# Altium PCB HANDS_FREE_ControlUnit_V1.PcbDoc (part 2 of 3)
Units mil, origin at the board's own origin, x right, y up, seen from the top; angles counter-clockwise.
Board outline 2372.03 x 3554.03 mil, 2 copper layers (Top Layer, Bottom Layer); 33 components, 66 nets, 337 pads, 84 vias.
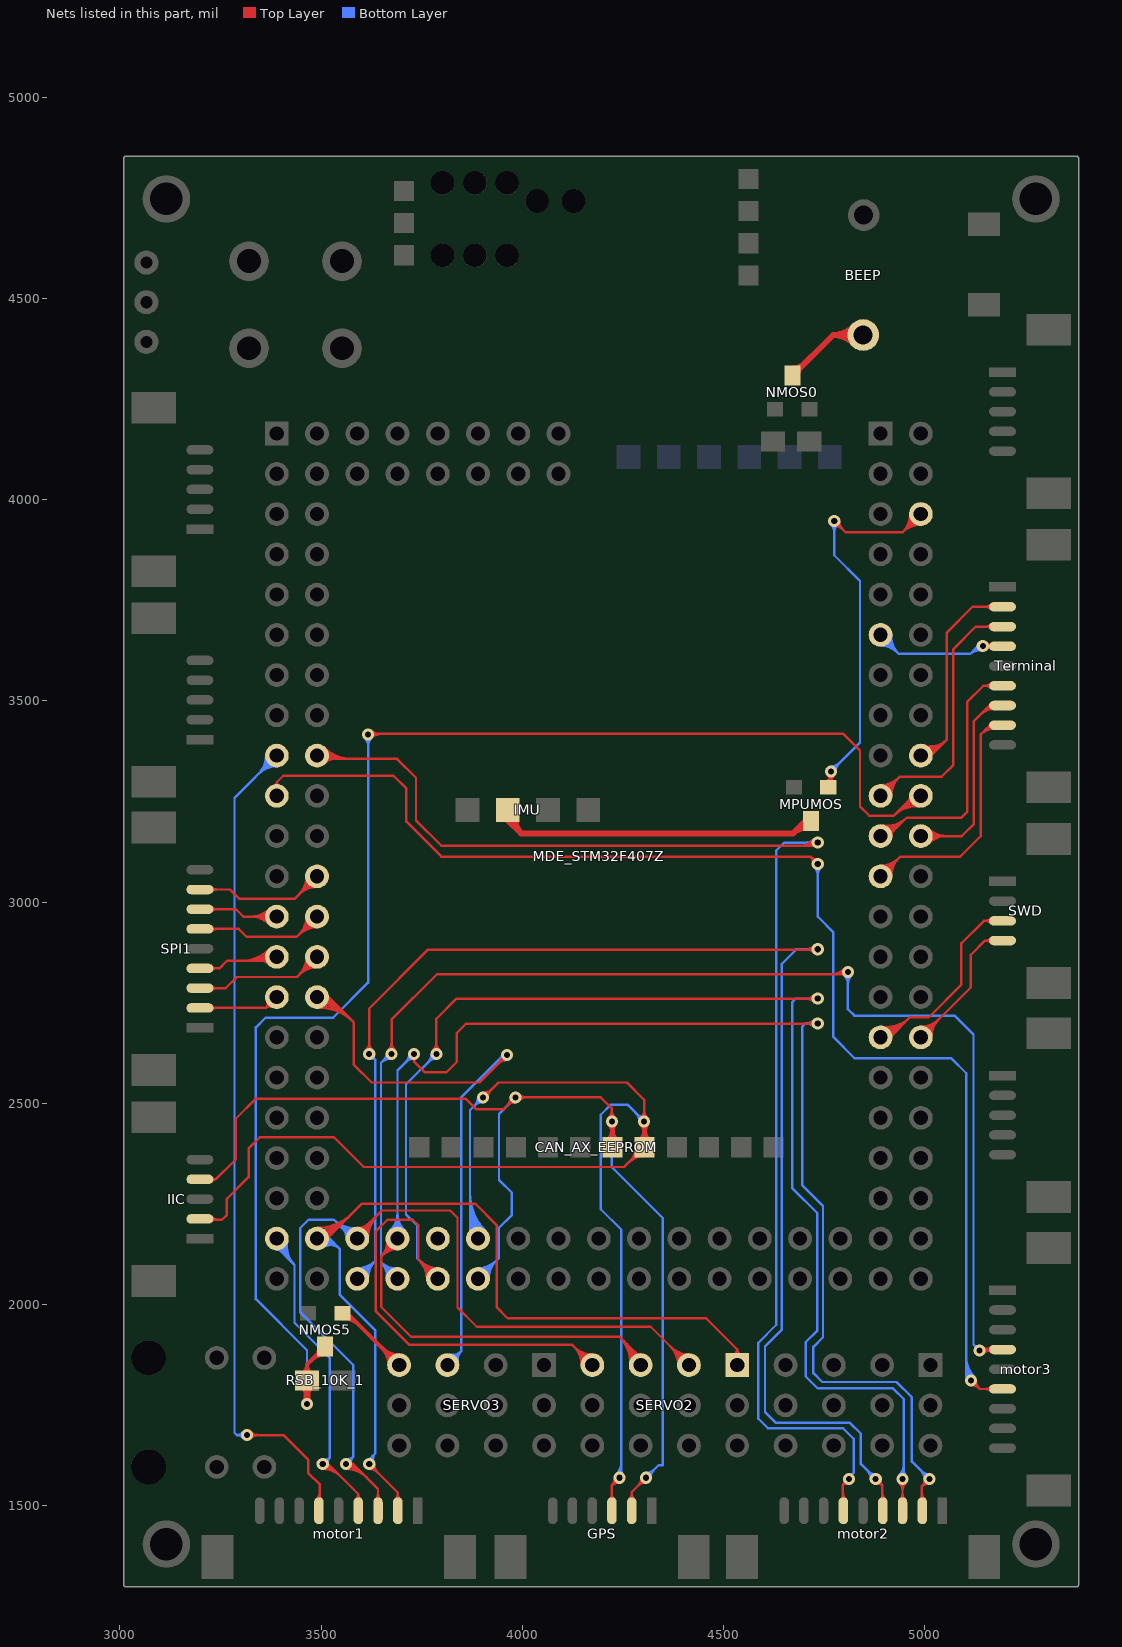
[diagram p2: the nets of this part, all layers, seen from the top]

## Via types
v1: diameter 30, hole 15, Top Layer to Bottom Layer, 70 vias
v2: diameter 40, hole 20, Top Layer to Bottom Layer, 11 vias
v3: diameter 50, hole 25, Top Layer to Bottom Layer, 3 vias

## Nets (pads, with @x,y where several pads share a name; then routed paths per layer and width w, separated by ;. In a path a pad name is that pad's centre, name@x,y a point inside that pad or via, vN(x,y) a via of type N, cw(c..) or ccw(c..) an arc to the next point about the centre after c; other vN are vias at no path point) (continued)
I2C2_SCL: CAN_AX_EEPROM.6 GPS.2 IIC.4 MDE_STM32F407Z.69 | length 3807.8
  Top Layer w6: IIC.4@3202,2311 3238,2311 ; IIC.4@3227.56,2305.95 cw(c3238,2297.68) 3238,2311 ; IIC.4@3227.96,2316.34 ccw(c3238,2323.1) 3238,2311 ; v1@3971,2515 cw(c3942.03,2515) 3962.51,2494.51 cw(c3983,2474.03) v1@3983,2503 ; v1@3991.49,2506.51 cw(c4011.97,2486.03) 4011.97,2515 cw(c4011.97,2543.97) v1@3991.49,2523.49 ; CAN_AX_EEPROM.6@4208.44,2406.56 ccw(c4174.34,2440.66) v1@4222.57,2440.66 ; CAN_AX_EEPROM.6@4212.69,2402.31 ccw(c4188.82,2426.18) 4222.57,2426.18 ; CAN_AX_EEPROM.6@4214,2399 4222,2391 4222.57,2391.57 v1(4222.57,2455) 4222.57,2487.43 4195,2515 v1(3983,2515) 3954,2486 3885,2486 3859,2512 3338,2512 3288,2462 3288,2361 3238,2311 ; v1@4214.09,2446.51 cw(c4193.6,2426.03) 4222.57,2426.03 cw(c4251.54,2426.03) v1@4231.06,2446.51 ; v1@4214.09,2463.49 ccw(c4193.6,2483.97) 4222.57,2483.97 ccw(c4251.54,2483.97) v1@4231.06,2463.49 ; v1@4214.56,2446.07 cw(c4202.4,2432.51) 4220.27,2428.99 ; v1@4216.17,2444.85 cw(c4203.69,2425.09) 4226.49,2430.24 ; v1@4218.57,2450.53 cw(c4210.59,2441.64) 4222.31,2439.33 ; 4220.98,2432.61 cw(c4240.12,2428.84) v1@4229.25,2445.03 ; 4222.57,2418.59 ccw(c4251.59,2418.59) CAN_AX_EEPROM.6@4231.07,2398.07 ; 4222.57,2433.08 ccw(c4266.08,2433.08) CAN_AX_EEPROM.6@4235.31,2402.31 ; v1@4222.57,2447.56 ccw(c4280.56,2447.56) CAN_AX_EEPROM.6@4239.56,2406.56 ; 4224.6,2438.58 cw(c4239.77,2442.01) v1@4227.36,2451.38 ; 4227.45,2425.97 cw(c4253.28,2431.81) v1@4232.15,2447.77 ; GPS.2@4265.56,1515.88 ccw(c4250.52,1530.93) 4271.79,1530.93 ccw(c4293.06,1530.93) GPS.2@4278.02,1515.88 ; GPS.2@4271.79,1482 4271.79,1534.45 v1(4307.33,1570) ; v1@4295.33,1570 cw(c4266.36,1570) 4286.85,1549.51 cw(c4307.33,1529.03) v1@4307.33,1558
  Bottom Layer w6: MDE_STM32F407Z.69@3890,2064.14 3942,2116.14 3942,2191 3974,2223 3974,2278 3942,2310 3942,2474 v1(3983,2515) ; MDE_STM32F407Z.69@3890,2078.67 ccw(c3890,2113.74) 3914.8,2088.94 ccw(c3939.6,2064.14) MDE_STM32F407Z.69@3904.53,2064.14 ; MDE_STM32F407Z.69@3890,2084.67 ccw(c3890,2134.22) 3925.04,2099.18 ccw(c3960.09,2064.14) MDE_STM32F407Z.69@3910.53,2064.14 ; MDE_STM32F407Z.69@3890,2090.67 ccw(c3890,2154.71) 3935.29,2109.42 ccw(c3980.57,2064.14) MDE_STM32F407Z.69@3916.53,2064.14 ; v1@3971,2515 cw(c3942.03,2515) 3962.51,2494.51 cw(c3983,2474.03) v1@3983,2503 ; v1@4214.09,2446.51 cw(c4193.6,2426.03) 4222.57,2426.03 cw(c4251.54,2426.03) v1@4231.06,2446.51 ; v1(4222.57,2455) 4222.57,2341.43 4349,2215 4349,1601 4338.33,1601 v1(4307.33,1570) ; v1@4307.33,1582 ccw(c4307.33,1610.97) 4327.82,1590.49 ccw(c4348.3,1570) v1@4319.33,1570
I2C2_SDA: CAN_AX_EEPROM.5 GPS.3 IIC.2 MDE_STM32F407Z.70 | length 4781.3
  Top Layer w6: IIC.2@3170.79,2211 IIC.2@3201.21,2211 ; IIC.2@3199,2213.21 IIC.2@3201.21,2211 ; IIC.2@3214,2211 IIC.2@3201.21,2211 ; IIC.2@3222.64,2215.2 ccw(c3232.78,2225.34) 3232.78,2211 ; IIC.2@3226.88,2206.98 cw(c3236.58,2197.28) 3236.58,2211 ; IIC.2@3226.88,2219.44 ccw(c3247.27,2239.83) 3247.27,2211 ; v1(3902,2515) 3904,2515 3941,2552 4260,2552 4302.71,2509.29 v1(4302.71,2455) 4302.71,2391.71 4253,2342 3606,2342 3532,2416 3348,2416 3320,2388 3320,2317 3266,2263 3266,2223 3254,2211 IIC.2@3201.21,2211 ; v1@3902,2521 ccw(c3902,2540.31) 3915.66,2526.66 ; v1@3902,2527 ccw(c3902,2560.8) 3925.9,2536.9 ; v1@3914,2515 cw(c3938.14,2515) 3921.07,2532.07 ; GPS.3@4216.34,1515.88 ccw(c4201.3,1530.93) 4222.57,1530.93 ccw(c4243.85,1530.93) GPS.3@4228.81,1515.88 ; GPS.3@4222.57,1482 4222.57,1550.91 v1(4241.67,1570) ; v1@4229.68,1569.39 cw(c4205.34,1568.14) 4222.58,1550.91 cw(c4239.81,1533.68) v1@4241.05,1558.02 ; 4263.03,2352.03 cw(c4304,2311.06) CAN_AX_EEPROM.5@4304,2369 ; 4267.86,2356.86 ccw(c4233.72,2391) CAN_AX_EEPROM.5@4282,2391 ; 4273.27,2362.27 cw(c4304,2331.54) CAN_AX_EEPROM.5@4304,2375 ; 4278.1,2367.1 ccw(c4254.2,2391) CAN_AX_EEPROM.5@4288,2391 ; CAN_AX_EEPROM.5@4283.51,2372.51 cw(c4304,2352.03) CAN_AX_EEPROM.5@4304,2381 ; CAN_AX_EEPROM.5@4288.44,2406.56 ccw(c4253.99,2441.01) v1@4302.71,2441.01 ; CAN_AX_EEPROM.5@4292.69,2402.31 ccw(c4268.48,2426.52) 4302.71,2426.52 ; v1@4294.23,2446.51 cw(c4273.74,2426.03) 4302.71,2426.03 cw(c4331.68,2426.03) v1@4311.2,2446.51 ; v1@4294.23,2463.49 ccw(c4273.74,2483.97) 4302.71,2483.97 ccw(c4331.68,2483.97) v1@4311.2,2463.49 ; v1@4294.62,2446.15 cw(c4282.09,2432.45) 4300.29,2428.83 ; v1@4296.3,2444.86 cw(c4283.92,2425.31) 4306.5,2430.38 ; v1@4298.66,2450.57 cw(c4290.49,2441.64) 4302.37,2439.27 ; 4301.03,2432.52 cw(c4320.3,2428.68) v1@4309.38,2445.02 ; 4302.71,2418.25 ccw(c4331.25,2418.25) CAN_AX_EEPROM.5@4311.07,2398.07 ; 4302.71,2432.73 ccw(c4345.73,2432.73) CAN_AX_EEPROM.5@4315.31,2402.31 ; v1@4302.71,2447.22 ccw(c4360.22,2447.22) CAN_AX_EEPROM.5@4319.56,2406.56 ; 4304.65,2438.6 cw(c4319.64,2441.97) v1@4307.47,2451.34 ; 4307.46,2426.12 cw(c4332.82,2431.82) v1@4312.22,2447.68
  Bottom Layer w6: 3870,2189.55 ccw(c3915.42,2189.55) MDE_STM32F407Z.70@3883.3,2157.44 ; 3870,2204.04 ccw(c3929.9,2204.04) MDE_STM32F407Z.70@3887.54,2161.68 ; 3870,2218.52 ccw(c3944.39,2218.52) MDE_STM32F407Z.70@3891.79,2165.92 ; 3870,2233.01 ccw(c3958.87,2233.01) MDE_STM32F407Z.70@3896.03,2170.17 ; 3870,2247.49 ccw(c3973.36,2247.49) MDE_STM32F407Z.70@3900.27,2174.41 ; 3870,2261.98 ccw(c3987.84,2261.98) MDE_STM32F407Z.70@3904.52,2178.65 ; 3870,2276.46 ccw(c4002.33,2276.46) MDE_STM32F407Z.70@3908.76,2182.9 ; MDE_STM32F407Z.70@3890,2164.14 3870,2184.14 3870,2483 v1(3902,2515) ; v1@3890,2515 cw(c3861.03,2515) 3881.51,2494.51 cw(c3902,2474.03) v1@3902,2503 ; v1@4233.18,1578.49 ccw(c4202.23,1609.43) 4246,1609.43 ; v1@4237.42,1574.24 ccw(c4216.72,1594.95) 4246,1594.95 ; v1(4241.67,1570) 4246,1574.33 4246,2186 4195,2237 4195,2472 4220,2497 4261,2497 v1@4302,2456 ; 4246,1588.51 ccw(c4260.18,1588.51) v1@4250.15,1578.49 ; 4282.03,2475.97 cw(c4261.05,2455) v1@4290.71,2455 ; 4282.72,2475.28 ccw(c4302.71,2495.28) v1@4302.71,2467
IMU_PWR: MDE_STM32F407Z.139 MPUMOS.1 | length 1499.3
  Top Layer w6: MPUMOS.1@4753,3297 ccw(c4732,3325) v1(4767,3325) 4767,3292 MPUMOS.1@4760,3285 ; MPUMOS.1@4756.6,3292.2 ccw(c4741,3313) v1@4767,3313 ; v1@4758.51,3316.51 cw(c4738.03,3296.03) 4767,3296.03 cw(c4795.97,3296.03) v1@4775.49,3316.51 ; v1@4759.62,3315.54 cw(c4754.9,3309.49) 4762.31,3307.5 cw(c4769.73,3305.51) v1@4768.66,3313.12 ; v1@4761.01,3314.6 cw(c4756.84,3307.36) 4764.91,3305.2 cw(c4778.62,3301.52) v1@4772.32,3314.25 ; 4767,3309.14 ccw(c4786.14,3309.14) MPUMOS.1@4772.61,3295.61 ; v1@4775,3935 cw(c4775,3906.03) 4795.49,3926.51 cw(c4815.97,3947) v1@4787,3947 ; v1(4775,3947) 4803,3919 4944.86,3919 ; MDE_STM32F407Z.139@4963.47,3964.08 cw(c4899.94,3963.93) 4944.87,3919 ; MDE_STM32F407Z.139@4969.47,3964.09 cw(c4920.31,3963.97) 4955.07,3929.21 cw(c4989.84,3894.45) MDE_STM32F407Z.139@4989.95,3943.61 ; MDE_STM32F407Z.139@4975.47,3964.1 cw(c4940.68,3964.02) 4965.28,3939.42 cw(c4989.88,3914.82) MDE_STM32F407Z.139@4989.97,3949.61 ; MDE_STM32F407Z.139@4989.94,3937.61 ccw(c4989.79,3874.08) 4944.87,3919 ; MDE_STM32F407Z.139@4990,3964.14 4944.86,3919
  Bottom Layer w6: v1@4766.51,3938.51 cw(c4746.03,3918.03) 4775,3918.03 cw(c4803.97,3918.03) v1@4783.49,3938.51 ; v1(4767,3325) 4839,3397 4839,3798 4775,3862 v1(4775,3947) ; v1@4767,3337 ccw(c4767,3365.97) 4787.49,3345.49 ccw(c4807.97,3325) v1@4779,3325 ; MDE_STM32F407Z.139@4984.14,3964.14 MDE_STM32F407Z.139@4990,3964.14
JY_PWR: MDE_STM32F407Z.68
MOTOR1_ADC: MDE_STM32F407Z.27 motor1.6 | length 2464.7
  Top Layer w6: v1@3315,1676 3407,1676 3468,1615 3468,1582 3497,1553 3497,1484.43 motor1.6@3494.57,1482 ; v1@3324.49,1667.51 cw(c3344.97,1647.03) 3344.97,1676 cw(c3344.97,1704.97) v1@3324.49,1684.49 ; MDE_STM32F407Z.27@3390,3364.14 MDE_STM32F407Z.27@3399.14,3364.14 ; motor1.6@3488.34,1515.88 ccw(c3467.45,1536.78) 3497,1536.78 ; motor1.6@3492.59,1511.64 ccw(c3481.93,1522.29) 3497,1522.29 ; 3497,1525.07 ccw(c3509.99,1525.07) motor1.6@3500.81,1515.88
  Bottom Layer w6: v1@3306.64,1668.49 ccw(c3291,1655.96) 3291,1676 ; v1@3306.64,1683.51 cw(c3291,1696.04) 3291,1676 ; v1@3328,1676 3291,1676 ; MDE_STM32F407Z.27@3363.47,3364.14 cw(c3299.43,3364.14) 3344.71,3318.85 cw(c3390,3273.57) MDE_STM32F407Z.27@3390,3337.61 ; MDE_STM32F407Z.27@3369.47,3364.14 cw(c3319.91,3364.14) 3354.96,3329.09 cw(c3390,3294.05) MDE_STM32F407Z.27@3390,3343.61 ; MDE_STM32F407Z.27@3375.47,3364.14 cw(c3340.4,3364.14) 3365.2,3339.34 cw(c3390,3314.54) MDE_STM32F407Z.27@3390,3349.61 ; MDE_STM32F407Z.27@3390,3364.14 3285,3259.14 3285,1682 3291,1676
  other v1: 3316,1676
MOTOR1_EN: MDE_STM32F407Z.59 motor1.4 | length 1238
  Top Layer w6: v1@3504.27,1592 cw(c3504.27,1529.87) 3548.2,1573.8 ; v1@3504.27,1598 cw(c3504.27,1550.36) 3537.95,1584.05 ; 3527.71,1594.29 ccw(c3504.27,1570.84) v1(3504.27,1604) 3518,1604 3592.57,1529.43 motor1.4@3592.57,1482 ; motor1.4@3586.68,1516.21 ccw(c3574.8,1529.42) 3592.57,1529.42 ccw(c3610.35,1529.42) motor1.4@3598.47,1516.21
  Bottom Layer w6: MDE_STM32F407Z.59@3390,2137.61 cw(c3390,2124.6) 3399.2,2133.8 ; MDE_STM32F407Z.59@3390,2164.14 3390,2143 3434,2099 ; MDE_STM32F407Z.59@3392.48,2163.63 ccw(c3428.2,2156.36) 3402.42,2130.58 ; MDE_STM32F407Z.59@3398.36,2162.44 ccw(c3441.32,2153.69) 3410.32,2122.68 ; MDE_STM32F407Z.59@3404.24,2161.24 ccw(c3454.43,2151.02) 3418.21,2114.79 ; MDE_STM32F407Z.59@3410.11,2160.04 ccw(c3467.55,2148.34) 3426.1,2106.9 ; MDE_STM32F407Z.59@3415.99,2158.84 ccw(c3480.67,2145.67) 3434,2099 ; v1@3492,1609 3511,1609 3522,1620 ; v1@3506.97,1615.69 ccw(c3510.6,1631.4) 3522,1620 ; v1@3516.24,1604.76 cw(c3535.99,1606.01) 3522,1620 ; 3434,2099 3434,1955 3522,1867 3522,1620
MOTOR2_ADC: MDE_STM32F407Z.28 motor2.6 | length 3865.2
  Top Layer w6: MDE_STM32F407Z.28@3490,3364.14 3498.14,3356 3689,3356 3736,3309 3736,3203 3799,3140 v1@4734,3140 ; MDE_STM32F407Z.28@3496.03,3370.17 ccw(c3530.23,3404.37) 3530.23,3356 ; MDE_STM32F407Z.28@3500.27,3374.41 ccw(c3544.72,3418.86) 3544.72,3356 ; MDE_STM32F407Z.28@3504.52,3349.62 cw(c3519.91,3334.23) 3519.91,3356 ; MDE_STM32F407Z.28@3504.52,3378.65 ccw(c3559.2,3433.34) 3559.2,3356 ; MDE_STM32F407Z.28@3508.76,3345.38 cw(c3534.4,3319.74) 3534.4,3356 ; MDE_STM32F407Z.28@3508.76,3382.9 ccw(c3573.69,3447.83) 3573.69,3356 ; 4685.72,3140 ccw(c4685.72,3196.28) v1@4725.51,3156.49 ; 4700.2,3140 ccw(c4700.2,3181.8) v1@4729.76,3152.24 ; 4714.69,3140 ccw(c4714.69,3167.31) v1(4734,3148) v1@4731,3151 ; motor2.6@4791.34,1515.88 ccw(c4778.72,1528.51) 4796.57,1528.51 ; motor2.6@4796.57,1482 4796.57,1552.17 v1(4811.4,1567) ; 4796.57,1533.34 ccw(c4821.26,1533.34) motor2.6@4803.81,1515.88 ; v1@4799.79,1563.98 cw(c4787.87,1560.88) 4796.58,1552.18 cw(c4805.28,1543.47) v1@4808.38,1555.39
  Bottom Layer w6: v1@4722,3151 v1@4725,3148 ; v1@4722,3153 v1@4725,3150 ; v1@4725.51,3139.51 ccw(c4705.03,3119.03) 4705.03,3148 ccw(c4705.03,3176.97) v1@4725.51,3156.49 ; v1(4734,3148) 4651,3148 4631,3128 4631,1950 4586,1905 4586,1717 4610,1693 4797,1693 4823,1667 4823,1582 v1@4816,1575
MOTOR2_EN: MDE_STM32F407Z.63 motor2.4 | length 4106.7
  Top Layer w6: v1@3611.18,2631.49 ccw(c3590.7,2651.97) 3619.67,2651.97 ccw(c3648.64,2651.97) v1@3628.15,2631.49 ; v1(3619.67,2623) 3619.67,2735.67 3766,2882 v1@4734,2882 ; 4702.62,2882 ccw(c4702.62,2914.38) v1@4725.51,2891.49 ; 4707.44,2882 cw(c4707.44,2856.44) v1@4725.51,2874.51 ; 4717.1,2882 ccw(c4717.1,2899.9) v1@4729.76,2887.24 ; v1(4878,1567) 4894.57,1550.43 ; v1@4879.92,1555.16 cw(c4882.63,1538.48) 4894.57,1550.43 ; motor2.4@4889.34,1515.88 ccw(c4876.72,1528.51) 4894.57,1528.51 ; v1@4889.84,1565.08 ccw(c4906.52,1562.37) 4894.57,1550.43 ; motor2.4@4894.57,1482 4894.57,1550.43 ; 4894.57,1533.34 ccw(c4919.26,1533.34) motor2.4@4901.81,1515.88
  Bottom Layer w6: MDE_STM32F407Z.63@3590,2064.14 3635,2109.14 ; MDE_STM32F407Z.63@3590.07,2078.66 ccw(c3590.22,2113.2) 3614.64,2088.78 ccw(c3639.06,2064.36) MDE_STM32F407Z.63@3604.53,2064.2 ; MDE_STM32F407Z.63@3590.09,2084.66 ccw(c3590.31,2133.46) 3624.82,2098.96 ccw(c3659.33,2064.45) MDE_STM32F407Z.63@3610.53,2064.23 ; MDE_STM32F407Z.63@3590.12,2090.66 ccw(c3590.41,2153.73) 3635,2109.13 ; MDE_STM32F407Z.63@3616.53,2064.26 cw(c3679.59,2064.54) 3635,2109.13 ; v1(3619.67,2623) 3635,2607.67 ; v1@3622.35,2611.3 cw(c3625.39,2598.06) 3635,2607.67 ; v1@3631.36,2620.32 ccw(c3644.61,2617.28) 3635,2607.67 ; v1@4725.51,2874.51 ccw(c4705.03,2854.03) 4705.03,2883 ccw(c4705.03,2911.97) v1@4725.51,2891.49 ; v1(4734,2883) 4681,2883 4645,2847 4645,1938 4603,1896 4603,1733 4629,1707 4813.26,1707 4841,1679.26 4841,1604 v1(4878,1567) ; v1@4866,1567 ccw(c4837.03,1567) 4857.51,1587.49 ccw(c4878,1607.97) v1@4878,1579 ; 3635,2109.14 3635,2607.67
MOTOR3_ADC: MDE_STM32F407Z.29 motor3.6 | length 3534.6
  Top Layer w6: MDE_STM32F407Z.29@3383.65,3289.89 ccw(c3381.65,3298) 3390,3298 ; MDE_STM32F407Z.29@3390,3264.14 3390,3298 ; MDE_STM32F407Z.29@3396.35,3289.89 cw(c3398.35,3298) 3390,3298 ; v1@4722.05,3096.15 ccw(c4701.15,3098.15) 4716,3113 ; v1@4732.85,3106.95 cw(c4730.85,3127.85) 4716,3113 ; v1(4734,3095) 4716,3113 ; v1@5115,1800 cw(c5115,1771.03) 5135.49,1791.51 cw(c5155.97,1812) v1@5127,1812 ; v1(5115,1812) 5136.43,1790.57 motor3.6@5201,1790.57 ; motor3.6@5165.12,1784.34 ccw(c5150.07,1769.3) 5150.07,1790.57 ccw(c5150.07,1811.85) motor3.6@5165.12,1796.81 ; 3390,3298 3406,3314 3680,3314 3712,3282 3712,3200 3799,3113 4716,3113
  Bottom Layer w6: v1@4725.51,3086.51 cw(c4705.03,3066.03) 4734,3066.03 cw(c4762.97,3066.03) v1@4742.49,3086.51 ; v1(4734,3095) 4734,2964 4773,2925 4773,2665 4826,2612 5066,2612 5103,2575 5103,1824 v1(5115,1812) cw(c5143.97,1840.97) 5103,1840.97 ; 5103,1826.49 ccw(c5129.49,1826.49) v1@5110.76,1807.76 ; 5103,1855.46 ccw(c5158.46,1855.46) v1@5119.24,1816.24 ; 5103,1869.94 ccw(c5172.94,1869.94) v1@5123.49,1820.49
MOTOR3_EN: MDE_STM32F407Z.65 motor3.4 | length 3681.9
  Top Layer w6: v1@3666.76,2631.49 ccw(c3646.28,2651.97) 3675.25,2651.97 ccw(c3704.22,2651.97) v1@3683.74,2631.49 ; v1(3675.25,2623) 3675.25,2708.25 3788,2821 v1@4809,2821 ; 4767.96,2821 ccw(c4767.96,2867.04) v1@4800.51,2834.49 ; 4782.44,2821 ccw(c4782.44,2852.56) v1@4804.76,2830.24 ; 4792.1,2821 cw(c4792.1,2809.1) v1@4800.51,2817.51 ; v1(5136,1886) 5138.57,1888.57 motor3.4@5201,1888.57 ; v1@5140.24,1881.76 cw(c5156.7,1865.3) 5156.7,1888.57 ; v1@5144.33,1894.64 ccw(c5154.85,1905.55) 5158.78,1890.91 ccw(c5163.54,1873.14) v1@5146.87,1880.92 ; v1@5144.49,1877.51 cw(c5171.19,1850.81) motor3.4@5171.19,1888.57 ; v1@5144.49,1894.49 ccw(c5158.75,1908.75) 5158.75,1888.57 ; motor3.4@5165.12,1882.34 ccw(c5150.07,1867.3) 5150.07,1888.57 ccw(c5150.07,1909.85) motor3.4@5165.12,1894.81
  Bottom Layer w6: 3657.77,2609.77 ccw(c3644.54,2623) v1@3663.25,2623 ; 3658.65,2610.65 cw(c3674.05,2595.25) v1@3674.99,2617.01 ; MDE_STM32F407Z.65@3663.54,2066.07 ccw(c3613.58,2069.71) 3649,2105.14 ; v1@3666,2618 3649,2601 ; MDE_STM32F407Z.65@3669.53,2065.63 ccw(c3630.86,2068.45) 3658.27,2095.86 ccw(c3685.69,2123.28) MDE_STM32F407Z.65@3688.51,2084.61 ; v1@3674.73,2611.01 ccw(c3673.25,2576.76) 3649,2601 ; MDE_STM32F407Z.65@3675.51,2065.19 ccw(c3648.15,2067.19) 3667.55,2086.59 ccw(c3686.95,2105.99) MDE_STM32F407Z.65@3688.94,2078.63 ; MDE_STM32F407Z.65@3688.07,2090.59 cw(c3684.43,2140.56) 3649,2105.14 ; MDE_STM32F407Z.65@3690,2064.14 3649,2105.14 ; v1@4800.51,2817.51 cw(c4780.03,2797.03) 4809,2797.03 cw(c4837.97,2797.03) v1@4817.49,2817.51 ; v1(4809,2826) 4809,2734 4825,2718 5074,2718 5121,2671 5121,1901 v1(5136,1886) ; 3649,2105.14 3649,2601
NetBEEP_2: BEEP.2 NMOS0.3 | length 443
  Top Layer w15: NMOS0.3@4671,4308 4772,4409 ; NMOS0.3@4671,4325.5 ccw(c4671,4367.75) 4700.87,4337.87 ; NMOS0.3@4683.5,4313 cw(c4701.61,4313) NMOS0.3@4688.8,4325.8 ; BEEP.2@4824.06,4386.88 ccw(c4772,4336.7) 4772,4409 ; BEEP.2@4824.06,4431.12 cw(c4772,4481.3) 4772,4409 ; BEEP.2@4834.86,4397.29 ccw(c4807.3,4370.73) 4807.3,4409 ccw(c4807.3,4447.27) BEEP.2@4834.86,4420.71 ; BEEP.2@4847,4409 4772,4409
NetNMOS5_1: NMOS5.1 SERVO3.10 | length 410.8
  Top Layer w10: NMOS5.1@3553,1979 3565,1979 SERVO3.10@3694,1850 ; NMOS5.1@3555,1966 cw(c3555,1910.47) 3594.26,1949.74 ; NMOS5.1@3555,1976 cw(c3555,1944.62) 3577.19,1966.81 ; SERVO3.10@3669.47,1850 ccw(c3610.26,1850) 3652.13,1891.87 ccw(c3694,1933.74) SERVO3.10@3694,1874.53 ; SERVO3.10@3679.47,1850 ccw(c3644.4,1850) 3669.2,1874.8 ccw(c3694,1899.6) SERVO3.10@3694,1864.53
POWER_IMU: IMU.2 MPUMOS.3 | length 973.5
  Top Layer w15: IMU.2@3964,3229 3964,3204 3997,3171 ; IMU.2@3970.65,3226.8 ccw(c4006.52,3214.92) 3979.8,3188.2 ; IMU.2@3984.88,3222.08 ccw(c4032.36,3206.37) 3997,3171 ; 4693.64,3191.77 cw(c4713.05,3172.36) MPUMOS.3@4717.4,3199.47 ; MPUMOS.3@4715.02,3184.66 ccw(c4707.32,3136.55) 4672.87,3171 ; MPUMOS.3@4717,3202 4703.87,3202 4672.87,3171 ; 3997,3171 4672.87,3171
PPM: MDE_STM32F407Z.46 SERVO3.7 | length 2206
  Top Layer w6: MDE_STM32F407Z.46@3489.69,2773.61 cw(c3491.13,2729.59) 3522.27,2760.73 ; MDE_STM32F407Z.46@3489.89,2767.61 cw(c3491.75,2710.63) 3532.06,2750.94 ; MDE_STM32F407Z.46@3490,2764.14 3518.86,2764.14 3581,2702 ; MDE_STM32F407Z.46@3490.08,2761.61 cw(c3492.37,2691.67) 3541.85,2741.15 ; MDE_STM32F407Z.46@3490.28,2755.61 cw(c3492.99,2672.72) 3551.63,2731.37 ; MDE_STM32F407Z.46@3490.47,2749.62 cw(c3493.61,2653.76) 3561.42,2721.58 ; MDE_STM32F407Z.46@3490.67,2743.62 cw(c3494.22,2634.81) 3571.21,2711.79 ; MDE_STM32F407Z.46@3490.87,2737.62 cw(c3494.84,2615.85) 3581,2702 ; v1@3950,2620 cw(c3921.03,2620) 3941.51,2599.51 cw(c3962,2579.03) v1@3962,2608 ; v1(3962,2620) 3894,2552 3626,2552 3581,2597 3581,2702
  Bottom Layer w6: SERVO3.7@3814,1850 3848,1884 ; SERVO3.7@3818.54,1870.02 ccw(c3823.72,1892.89) 3840.31,1876.31 ccw(c3856.89,1859.72) SERVO3.7@3834.02,1854.54 ; SERVO3.7@3819.86,1875.87 ccw(c3826.57,1905.43) 3848,1884 ; SERVO3.7@3839.87,1855.86 cw(c3869.43,1862.57) 3848,1884 ; 3926.15,2593.15 cw(c3962,2557.3) v1@3962,2608 ; 3936.39,2603.39 cw(c3962,2577.79) v1@3962,2614 ; 3946.64,2613.64 cw(c3962,2598.27) v1(3962,2620) 3953,2620 3848,2515 3848,1884 ; 3947.88,2614.88 ccw(c3942.76,2620) v1@3950,2620
SBUS: MDE_STM32F407Z.122 NMOS5.3 RSB_10K_1.1 | length 4523.3
  Top Layer w6: RSB_10K_1.1@3449.51,1796.44 cw(c3411.95,1758.89) 3465.06,1758.89 cw(c3518.18,1758.89) RSB_10K_1.1@3480.62,1796.44 ; RSB_10K_1.1@3453.75,1800.69 cw(c3426.44,1773.37) 3465.06,1773.37 cw(c3503.69,1773.37) RSB_10K_1.1@3476.38,1800.69 ; v1@3455.04,1759.6 ccw(c3431.25,1775.29) 3458.8,1782.57 ; v1@3456.58,1761.49 ccw(c3436.09,1781.97) 3465.06,1781.97 ccw(c3494.03,1781.97) v1@3473.55,1761.49 ; v1@3459.03,1763.37 ccw(c3447.04,1783.97) 3470.08,1777.88 ; v1@3460.05,1756.3 ccw(c3446.27,1765.39) 3462.23,1769.6 ; 3460.04,1777.88 ccw(c3483.08,1783.97) v1@3471.1,1763.37 ; RSB_10K_1.1@3465.06,1812 v1(3465.06,1753) 3465.06,1741.94 v1@3466,1741 ; 3467.9,1769.6 ccw(c3483.85,1765.39) v1@3470.07,1756.3 ; 3471.32,1782.57 ccw(c3498.87,1775.29) v1@3475.08,1759.6 ; v1@3618,3417 3619,3418 4798,3418 4839,3377 4839,3238 4862,3215 4923,3215 ; v1@3621.24,3412.76 cw(c3633.9,3400.1) 3633.9,3418 ; v1@3625.49,3408.51 cw(c3648.38,3385.62) 3648.38,3418 ; v1@3625.49,3425.49 ccw(c3643.56,3443.56) 3643.56,3418 ; 4931.9,3223.9 cw(c4980.66,3175.14) MDE_STM32F407Z.122@4987.86,3243.72 ; 4940.8,3232.8 cw(c4982.35,3191.24) MDE_STM32F407Z.122@4988.48,3249.69 ; 4949.69,3241.69 cw(c4984.04,3207.35) MDE_STM32F407Z.122@4989.11,3255.66 ; 4957.35,3249.35 ccw(c4942.55,3264.14) MDE_STM32F407Z.122@4963.47,3264.14 ; 4958.59,3250.59 cw(c4985.73,3223.45) MDE_STM32F407Z.122@4989.74,3261.62 ; MDE_STM32F407Z.122@4987.23,3237.75 ccw(c4978.97,3159.03) 4923,3215 ; MDE_STM32F407Z.122@4990,3264.14 4972.14,3264.14 4923,3215
  Top Layer w10: RSB_10K_1.1@3453.37,1828.23 ccw(c3436.92,1851.06) 3465.06,1851.06 ; RSB_10K_1.1@3465.06,1812 3465.06,1851.06 ; 3475.86,1861.86 cw(c3510,1827.72) NMOS5.3@3510,1876 ; RSB_10K_1.1@3476.75,1828.23 cw(c3493.21,1851.06) 3465.06,1851.06 ; 3487.93,1873.93 ccw(c3470.86,1891) NMOS5.3@3495,1891 ; NMOS5.3@3492.93,1878.93 cw(c3510,1861.86) NMOS5.3@3510,1886 ; NMOS5.3@3510,1896 3465.06,1851.06
  Bottom Layer w6: v1@3456.58,1761.49 ccw(c3436.09,1781.97) 3465.06,1781.97 ccw(c3494.03,1781.97) v1@3473.55,1761.49 ; v1(3465.06,1753) 3465.06,1886.94 3338,2014 3338,2689 3362,2713 3530,2713 3617,2800 v1(3617,3417) ; v1@3608.51,3408.51 cw(c3588.03,3388.03) 3617,3388.03 cw(c3645.97,3388.03) v1@3625.49,3408.51
SPI1_IOA: MDE_STM32F407Z.45 SPI1.2 | length 269.8
  Top Layer w6: SPI1.2@3199,2737.21 3363.07,2737.21 ; SPI1.2@3226.88,2730.98 cw(c3241.93,2715.94) 3241.93,2737.21 cw(c3241.93,2758.48) SPI1.2@3226.88,2743.44 ; MDE_STM32F407Z.45@3365.91,2753.04 cw(c3353.13,2747.16) 3363.08,2737.21 ; MDE_STM32F407Z.45@3378.9,2740.04 ccw(c3373.02,2727.27) 3363.08,2737.21 ; MDE_STM32F407Z.45@3390,2764.14 3363.07,2737.21
SPI1_IOB: MDE_STM32F407Z.44 SPI1.3 | length 590.1
  Top Layer w6: SPI1.3@3199,2786.43 3263.43,2786.43 3291,2814 3439.86,2814 MDE_STM32F407Z.44@3490,2864.14 ; SPI1.3@3226.88,2780.19 cw(c3241.93,2765.15) 3241.93,2786.43 cw(c3241.93,2807.7) SPI1.3@3226.88,2792.66 ; MDE_STM32F407Z.44@3463.47,2864.14 cw(c3399.43,2864.14) 3444.71,2818.85 cw(c3490,2773.57) MDE_STM32F407Z.44@3490,2837.61 ; MDE_STM32F407Z.44@3469.47,2864.14 cw(c3419.91,2864.14) 3454.96,2829.09 cw(c3490,2794.05) MDE_STM32F407Z.44@3490,2843.61 ; MDE_STM32F407Z.44@3475.47,2864.14 cw(c3440.4,2864.14) 3465.2,2839.34 cw(c3490,2814.54) MDE_STM32F407Z.44@3490,2849.61
SPI1_MISO: MDE_STM32F407Z.42 SPI1.6 | length 586.8
  Top Layer w6: SPI1.6@3199,2933.43 3295.57,2933.43 3315,2914 3439.86,2914 MDE_STM32F407Z.42@3490,2964.14 ; SPI1.6@3226.88,2927.19 cw(c3241.93,2912.15) 3241.93,2933.43 cw(c3241.93,2954.7) SPI1.6@3226.88,2939.66 ; MDE_STM32F407Z.42@3463.47,2964.14 cw(c3399.43,2964.14) 3444.71,2918.85 cw(c3490,2873.57) MDE_STM32F407Z.42@3490,2937.61 ; MDE_STM32F407Z.42@3469.47,2964.14 cw(c3419.91,2964.14) 3454.96,2929.09 cw(c3490,2894.05) MDE_STM32F407Z.42@3490,2943.61 ; MDE_STM32F407Z.42@3475.47,2964.14 cw(c3440.4,2964.14) 3465.2,2939.34 cw(c3490,2914.54) MDE_STM32F407Z.42@3490,2949.61
SPI1_MOSI: MDE_STM32F407Z.43 SPI1.4 | length 528.5
  Top Layer w6: SPI1.4@3199,2835.43 3247.43,2835.43 3266.43,2854.43 3380.29,2854.43 MDE_STM32F407Z.43@3390,2864.14 ; SPI1.4@3226.88,2829.19 cw(c3241.93,2814.15) 3241.93,2835.43 cw(c3241.93,2856.7) SPI1.4@3226.88,2841.66 ; 3302.51,2854.43 ccw(c3302.51,2951.63) MDE_STM32F407Z.43@3371.24,2882.9 ; 3316.99,2854.43 ccw(c3316.99,2937.14) MDE_STM32F407Z.43@3375.48,2878.65 ; 3331.48,2854.43 ccw(c3331.48,2922.66) MDE_STM32F407Z.43@3379.73,2874.41 ; 3345.97,2854.43 ccw(c3345.97,2908.17) MDE_STM32F407Z.43@3383.97,2870.17 ; 3349.4,2854.43 cw(c3349.4,2823.54) MDE_STM32F407Z.43@3371.24,2845.38 ; 3360.45,2854.43 ccw(c3360.45,2893.69) MDE_STM32F407Z.43@3388.21,2865.92
SPI1_NSS: MDE_STM32F407Z.40 SPI1.8 | length 590.9
  Top Layer w6: SPI1.8@3199,3031.43 3273.57,3031.43 3297,3008 3433.86,3008 MDE_STM32F407Z.40@3490,3064.14 ; SPI1.8@3226.88,3025.19 cw(c3241.93,3010.15) 3241.93,3031.43 cw(c3241.93,3052.7) SPI1.8@3226.88,3037.66 ; MDE_STM32F407Z.40@3463.47,3064.14 cw(c3399.43,3064.14) 3444.71,3018.85 cw(c3490,2973.57) MDE_STM32F407Z.40@3490,3037.61 ; MDE_STM32F407Z.40@3469.47,3064.14 cw(c3419.91,3064.14) 3454.96,3029.09 cw(c3490,2994.05) MDE_STM32F407Z.40@3490,3043.61 ; MDE_STM32F407Z.40@3475.47,3064.14 cw(c3440.4,3064.14) 3465.2,3039.34 cw(c3490,3014.54) MDE_STM32F407Z.40@3490,3049.61
SPI1_SCK: MDE_STM32F407Z.41 SPI1.7 | length 465.5
  Top Layer w6: SPI1.7@3199,2982.43 3288.57,2982.43 3306.86,2964.14 MDE_STM32F407Z.41@3390,2964.14 ; SPI1.7@3226.88,2976.19 cw(c3241.93,2961.15) 3241.93,2982.43 cw(c3241.93,3003.7) SPI1.7@3226.88,2988.66 ; MDE_STM32F407Z.41@3371.24,2945.38 ccw(c3325.96,2900.09) 3325.96,2964.14 ccw(c3325.96,3028.18) MDE_STM32F407Z.41@3371.24,2982.9 ; MDE_STM32F407Z.41@3375.48,2949.62 ccw(c3340.44,2914.58) 3340.44,2964.14 ccw(c3340.44,3013.7) MDE_STM32F407Z.41@3375.48,2978.65 ; MDE_STM32F407Z.41@3379.73,2953.87 ccw(c3354.93,2929.07) 3354.93,2964.14 ccw(c3354.93,2999.21) MDE_STM32F407Z.41@3379.73,2974.41
SWCLK: MDE_STM32F407Z.109 SWD.3 | length 852.8
  Top Layer w6: MDE_STM32F407Z.109@4889.54,2660.7 ccw(c4894.32,2696.74) 4920.03,2671.03 ; MDE_STM32F407Z.109@4890,2664.14 4913.14,2664.14 4963,2714 ; MDE_STM32F407Z.109@4890.33,2666.64 ccw(c4896.33,2711.91) 4928.62,2679.62 ; MDE_STM32F407Z.109@4891.12,2672.59 ccw(c4898.34,2727.09) 4937.22,2688.22 ; MDE_STM32F407Z.109@4891.91,2678.54 ccw(c4900.35,2742.26) 4945.81,2696.81 ; MDE_STM32F407Z.109@4892.7,2684.49 ccw(c4902.37,2757.44) 4954.4,2705.4 ; MDE_STM32F407Z.109@4893.49,2690.44 ccw(c4904.38,2772.62) 4963,2714 ; SWD.3@5165.12,2947.34 ccw(c5150.07,2932.3) 5150.07,2953.57 ccw(c5150.07,2974.85) SWD.3@5165.12,2959.81 ; SWD.3@5201,2953.57 5146.57,2953.57 5091,2898 5091,2795 5010,2714 4963,2714
SWDIO: MDE_STM32F407Z.105 SWD.4 | length 624.9
  Top Layer w6: MDE_STM32F407Z.105@4990,2664.14 5114,2788.14 5114,2869 5149.57,2904.57 SWD.4@5201,2904.57 ; MDE_STM32F407Z.105@4990,2678.67 ccw(c4990,2713.74) 5014.8,2688.94 ccw(c5039.6,2664.14) MDE_STM32F407Z.105@5004.53,2664.14 ; MDE_STM32F407Z.105@4990,2684.67 ccw(c4990,2734.22) 5025.04,2699.18 ccw(c5060.09,2664.14) MDE_STM32F407Z.105@5010.53,2664.14 ; MDE_STM32F407Z.105@4990,2690.67 ccw(c4990,2754.71) 5035.29,2709.42 ccw(c5080.57,2664.14) MDE_STM32F407Z.105@5016.53,2664.14 ; SWD.4@5165.12,2898.34 ccw(c5150.07,2883.3) 5150.07,2904.57 ccw(c5150.07,2925.85) SWD.4@5165.12,2910.81
T_IO1: MDE_STM32F407Z.117 Terminal.8 | length 911.5
  Top Layer w6: MDE_STM32F407Z.117@4890,3060 MDE_STM32F407Z.117@4890,3064.14 4938.86,3113 5088,3113 5139,3164 5139,3417 5161.57,3439.57 Terminal.8@5201,3439.57 ; MDE_STM32F407Z.117@4890,3078.67 ccw(c4890,3113.74) 4914.8,3088.94 ccw(c4939.6,3064.14) MDE_STM32F407Z.117@4904.53,3064.14 ; MDE_STM32F407Z.117@4890,3084.67 ccw(c4890,3134.22) 4925.04,3099.18 ccw(c4960.09,3064.14) MDE_STM32F407Z.117@4910.53,3064.14 ; MDE_STM32F407Z.117@4890,3090.67 ccw(c4890,3154.71) 4935.29,3109.42 ccw(c4980.57,3064.14) MDE_STM32F407Z.117@4916.53,3064.14 ; 5139.62,3417.62 cw(c5171.35,3385.9) Terminal.8@5171.35,3430.76 ; 5149.87,3427.87 cw(c5171.35,3406.39) Terminal.8@5171.35,3436.76
T_IO2: MDE_STM32F407Z.118 Terminal.7 | length 805.9
  Top Layer w6: MDE_STM32F407Z.118@4990,3164.14 5091.71,3164.14 5122,3194.43 5122,3450 5160.57,3488.57 Terminal.7@5201,3488.57 ; MDE_STM32F407Z.118@5000.27,3153.87 cw(c5025.07,3129.07) 5025.07,3164.14 cw(c5025.07,3199.21) MDE_STM32F407Z.118@5000.27,3174.41 ; MDE_STM32F407Z.118@5004.52,3149.62 cw(c5039.56,3114.58) 5039.56,3164.14 cw(c5039.56,3213.7) MDE_STM32F407Z.118@5004.52,3178.65 ; MDE_STM32F407Z.118@5008.76,3145.38 cw(c5054.04,3100.09) 5054.04,3164.14 cw(c5054.04,3228.18) MDE_STM32F407Z.118@5008.76,3182.9 ; 5137.92,3465.92 cw(c5171.35,3432.49) Terminal.7@5171.35,3479.76 ; 5148.16,3476.16 cw(c5171.35,3452.97) Terminal.7@5171.35,3485.76 ; 5158.4,3486.4 cw(c5171.35,3473.46) Terminal.7@5171.35,3491.76
T_IO3: MDE_STM32F407Z.119 Terminal.6 | length 924.5
  Top Layer w6: MDE_STM32F407Z.119@4890,3164.14 4909.14,3164.14 4955,3210 ; MDE_STM32F407Z.119@4890.4,3166.63 ccw(c4896.16,3202.42) 4921.79,3176.79 ; MDE_STM32F407Z.119@4891.35,3172.56 ccw(c4898.46,3216.72) 4930.09,3185.09 ; MDE_STM32F407Z.119@4892.31,3178.48 ccw(c4900.76,3231.03) 4938.39,3193.39 ; MDE_STM32F407Z.119@4893.26,3184.4 ccw(c4903.06,3245.33) 4946.7,3201.7 ; MDE_STM32F407Z.119@4894.21,3190.33 ccw(c4905.36,3259.63) 4955,3210 ; MDE_STM32F407Z.119@4916.53,3164.14 cw(c4934.37,3164.14) 4921.75,3176.75 ; Terminal.6@5165.12,3531.34 ccw(c5150.07,3516.3) 5150.07,3537.57 ccw(c5150.07,3558.85) Terminal.6@5165.12,3543.81 ; Terminal.6@5201,3537.57 5145.57,3537.57 5105,3497 5105,3224 5091,3210 4955,3210
T_IO4: MDE_STM32F407Z.133 Terminal.4 | length 709.1
  Top Layer w6: v1(5144,3636) 5192.57,3636 Terminal.4@5193,3635.57 ; v1@5149.05,3636 cw(c5149.05,3613.28) Terminal.4@5165.12,3629.34 ; v1@5151.1,3636 ccw(c5151.1,3655.82) Terminal.4@5165.12,3641.81 ; v1@5152.49,3627.51 cw(c5172.97,3607.03) 5172.97,3636 cw(c5172.97,3664.97) v1@5152.49,3644.49
  Bottom Layer w6: MDE_STM32F407Z.133@4890,3637.61 cw(c4890,3578.73) 4931.64,3620.36 ; MDE_STM32F407Z.133@4890,3643.61 cw(c4890,3599.21) 4921.39,3630.61 ; MDE_STM32F407Z.133@4890,3649.61 cw(c4890,3619.7) 4911.15,3640.85 ; MDE_STM32F407Z.133@4890,3664.14 4890,3662 4935,3617 ; MDE_STM32F407Z.133@4904.52,3663.74 ccw(c4941.29,3662.73) 4915.28,3636.72 ; MDE_STM32F407Z.133@4910.52,3663.57 ccw(c4960.48,3662.2) 4925.14,3626.86 ; MDE_STM32F407Z.133@4916.52,3663.41 ccw(c4979.67,3661.68) 4935,3617 ; 5120.32,3624.32 cw(c5136.46,3608.19) v1@5142.43,3630.21 ; 5127.65,3631.65 cw(c5139.58,3619.71) v1(5144,3636) 5132,3636 5113,3617 ; v1@5140.86,3624.42 ccw(c5133.33,3596.67) 5113,3617 ; 4935,3617 5113,3617
T_IO5: MDE_STM32F407Z.123 Terminal.3 | length 920.8
  Top Layer w6: MDE_STM32F407Z.123@4890,3264.14 4937.86,3312 5042,3312 5071,3341 5071,3629 5126.57,3684.57 Terminal.3@5201,3684.57 ; MDE_STM32F407Z.123@4890,3278.67 ccw(c4890,3313.74) 4914.8,3288.94 ccw(c4939.6,3264.14) MDE_STM32F407Z.123@4904.53,3264.14 ; MDE_STM32F407Z.123@4890,3284.67 ccw(c4890,3334.22) 4925.04,3299.18 ccw(c4960.09,3264.14) MDE_STM32F407Z.123@4910.53,3264.14 ; MDE_STM32F407Z.123@4890,3290.67 ccw(c4890,3354.71) 4935.29,3309.42 ccw(c4980.57,3264.14) MDE_STM32F407Z.123@4916.53,3264.14 ; Terminal.3@5165.12,3678.34 ccw(c5150.07,3663.3) 5150.07,3684.57 ccw(c5150.07,3705.85) Terminal.3@5165.12,3690.81
T_IO6: MDE_STM32F407Z.124 Terminal.2 | length 800.4
  Top Layer w6: MDE_STM32F407Z.124@4990,3364.14 5015.14,3364.14 5054,3403 ; MDE_STM32F407Z.124@4990.77,3366.55 ccw(c5001.4,3399.87) 5026.14,3375.14 ; MDE_STM32F407Z.124@4992.59,3372.26 ccw(c5004.77,3410.44) 5033.1,3382.1 ; MDE_STM32F407Z.124@4994.42,3377.98 ccw(c5008.14,3421) 5040.07,3389.07 ; MDE_STM32F407Z.124@4996.24,3383.69 ccw(c5011.51,3431.56) 5047.03,3396.03 ; MDE_STM32F407Z.124@4998.06,3389.41 ccw(c5014.88,3442.12) 5054,3403 ; Terminal.2@5165.12,3727.56 ccw(c5150.07,3712.52) 5150.07,3733.79 ccw(c5150.07,3755.06) Terminal.2@5165.12,3740.02 ; Terminal.2@5201,3733.79 5118.79,3733.79 5054,3669 5054,3403
TIM1_PWMOUT1: MDE_STM32F407Z.60 motor1.2 SERVO2.1 | length 3042.8
  Top Layer w6: MDE_STM32F407Z.60@3490,2160.67 ccw(c3490,2212.97) 3526.98,2175.98 ; MDE_STM32F407Z.60@3490,2164.14 3515.14,2164.14 3602,2251 3883,2251 3937,2197 3937,1993 3964,1966 4457,1966 4534,1889 ; MDE_STM32F407Z.60@3490,2166.67 ccw(c3490,2233.45) 3537.23,2186.23 ; MDE_STM32F407Z.60@3490,2172.67 ccw(c3490,2253.94) 3547.47,2196.47 ; MDE_STM32F407Z.60@3490,2178.67 ccw(c3490,2274.43) 3557.71,2206.71 ; MDE_STM32F407Z.60@3490,2184.67 ccw(c3490,2294.91) 3567.96,2216.96 ; MDE_STM32F407Z.60@3490,2190.67 ccw(c3490,2315.4) 3578.2,2227.2 ; v1@3619.73,1592 cw(c3619.73,1563.03) 3640.22,1583.51 cw(c3660.7,1604) v1@3631.73,1604 ; v1(3619.73,1604) 3690.79,1532.95 motor1.2@3690.79,1482 ; motor1.2@3684.56,1515.88 ccw(c3669.52,1530.93) 3690.79,1530.93 ccw(c3712.06,1530.93) motor1.2@3697.02,1515.88 ; SERVO2.1@4524.26,1874.67 ccw(c4518.6,1889) 4534,1889 ; SERVO2.1@4526.46,1869.09 ccw(c4522.08,1880.18) 4534,1880.18 ccw(c4545.92,1880.18) SERVO2.1@4541.54,1869.09 ; SERVO2.1@4534,1850 4534,1889 ; SERVO2.1@4543.74,1874.67 cw(c4549.4,1889) 4534,1889
  Bottom Layer w6: MDE_STM32F407Z.60@3488,2166.97 cw(c3502.75,2146.09) 3520.83,2164.17 ; MDE_STM32F407Z.60@3490,2164.14 3520.86,2164.14 ; MDE_STM32F407Z.60@3491.46,2162.07 cw(c3506.92,2140.19) 3525.86,2159.14 ; MDE_STM32F407Z.60@3494.92,2157.17 cw(c3511.09,2134.3) 3530.9,2154.1 ; MDE_STM32F407Z.60@3498.38,2152.27 cw(c3515.26,2128.4) 3535.93,2149.07 ; MDE_STM32F407Z.60@3501.85,2147.37 cw(c3519.43,2122.5) 3540.96,2144.04 ; MDE_STM32F407Z.60@3505.31,2142.47 cw(c3523.59,2116.6) 3546,2139 ; MDE_STM32F407Z.60@3516.23,2160.15 cw(c3520.86,2159.45) 3520.86,2164.14 ; MDE_STM32F407Z.60@3516.23,2168.12 ccw(c3520.86,2168.83) 3520.86,2164.14 ; v1@3612,1608 3635,1631 ; v1@3625.24,1606.38 cw(c3640.52,1612.98) 3628.75,1624.75 ; v1@3630.75,1608.76 cw(c3649.25,1616.75) 3635,1631 ; 3520.86,2164.14 3546,2139 ; 3546,2139 3546,2025 3635,1936 3635,1631
TIM1_PWMOUT2: MDE_STM32F407Z.64 motor1.3 SERVO2.4 | length 3103.4
  Top Layer w6: v1@3562,1592 cw(c3562,1519.57) 3613.21,1570.79 ; v1@3562,1598 cw(c3562,1540.06) 3602.97,1581.03 ; v1@3562,1610 cw(c3562,1581.03) 3582.49,1601.51 ; v1@3573.08,1599.39 cw(c3580,1596.5) 3580,1604 ; v1@3573.08,1608.61 ccw(c3580,1611.5) 3580,1604 ; MDE_STM32F407Z.64@3590,2164.14 3590,2173 3651,2234 3821,2234 3839,2216 3839,1993 3887,1945 4319,1945 SERVO2.4@4414,1850 ; MDE_STM32F407Z.64@3590,2184.67 ccw(c3590,2212.83) 3609.91,2192.91 ; MDE_STM32F407Z.64@3590,2190.67 ccw(c3590,2233.31) 3620.16,2203.16 ; 3592.73,1591.27 ccw(c3562,1560.54) v1(3562,1604) 3580,1604 ; MDE_STM32F407Z.64@3598.53,2164.14 cw(c3640.51,2164.14) 3610.82,2193.82 ; MDE_STM32F407Z.64@3604.53,2164.14 cw(c3661,2164.14) 3621.07,2204.07 ; MDE_STM32F407Z.64@3610.53,2164.14 cw(c3681.48,2164.14) 3631.31,2214.31 ; MDE_STM32F407Z.64@3616.53,2164.14 cw(c3701.97,2164.14) 3641.55,2224.55 ; motor1.3@3635.34,1515.88 ccw(c3620.3,1530.93) 3641.57,1530.93 ccw(c3662.85,1530.93) motor1.3@3647.81,1515.88 ; motor1.3@3641.57,1482 3641.57,1542.43 3580,1604 ; SERVO2.4@4387.47,1850 ccw(c4323.43,1850) 4368.71,1895.29 ccw(c4414,1940.57) SERVO2.4@4414,1876.53 ; SERVO2.4@4393.47,1850 ccw(c4343.91,1850) 4378.96,1885.04 ccw(c4414,1920.09) SERVO2.4@4414,1870.53 ; SERVO2.4@4399.47,1850 ccw(c4364.4,1850) 4389.2,1874.8 ccw(c4414,1899.6) SERVO2.4@4414,1864.53
  Bottom Layer w6: 3541.15,2201.85 ccw(c3583.32,2244.02) MDE_STM32F407Z.64@3588.29,2184.59 ; 3550.29,2192.71 ccw(c3584.73,2227.15) MDE_STM32F407Z.64@3588.79,2178.61 ; 3552.59,2190.41 cw(c3526.32,2164.14) MDE_STM32F407Z.64@3563.47,2164.14 ; 3559.43,2183.57 ccw(c3586.14,2210.27) MDE_STM32F407Z.64@3589.29,2172.64 ; v1(3562,1604) 3580,1622 ; 3562.83,2180.17 cw(c3546.8,2164.14) MDE_STM32F407Z.64@3569.47,2164.14 ; v1@3563.15,1615.95 ccw(c3565.15,1636.85) 3580,1622 ; v1@3573.95,1605.15 cw(c3594.85,1607.15) 3580,1622 ; MDE_STM32F407Z.64@3587.79,2190.57 cw(c3581.91,2260.9) 3532,2211 ; MDE_STM32F407Z.64@3590,2164.14 3578.86,2164.14 3532,2211 ; 3532,2211 3469,2211 3448,2190 3448,1982 3580,1850 3580,1622
TIM1_PWMOUT3: MDE_STM32F407Z.66 motor2.2 SERVO2.7 | length 5006.3
  Top Layer w6: 3651.78,2121.78 cw(c3690,2083.56) MDE_STM32F407Z.66@3690,2137.61 ; 3658.15,2128.15 ccw(c3629.69,2156.61) MDE_STM32F407Z.66@3669.63,2161.6 ; 3662.02,2132.02 cw(c3690,2104.04) MDE_STM32F407Z.66@3690,2143.61 ; MDE_STM32F407Z.66@3663.68,2160.85 cw(c3614.26,2154.69) 3649.47,2119.47 ; 3666.83,2136.83 ccw(c3645.12,2158.54) MDE_STM32F407Z.66@3675.58,2162.34 ; MDE_STM32F407Z.66@3690,2164.14 3690,2160 3649.47,2119.47 ; v1@3725.76,2612.12 cw(c3722.06,2604.17) 3730.83,2604.17 ; v1(3730.83,2623) 3730.83,2604.17 ; v1@3735.9,2612.12 ccw(c3739.61,2604.17) 3730.83,2604.17 ; 4251.33,1910.67 cw(c4197.31,1856.66) SERVO2.7@4273.52,1851.41 ; 4260.65,1901.35 cw(c4214.75,1855.46) SERVO2.7@4279.51,1851 ; SERVO2.7@4267.54,1851.82 ccw(c4179.86,1857.86) 4242,1920 ; 4269.97,1892.03 cw(c4232.2,1854.25) SERVO2.7@4285.49,1850.59 ; 4279.3,1882.7 cw(c4249.64,1853.05) SERVO2.7@4291.48,1850.17 ; 4279.44,1882.56 ccw(c4294,1897.11) SERVO2.7@4294,1876.53 ; SERVO2.7@4294,1850 4294,1868 4242,1920 ; 4702.62,2698 ccw(c4702.62,2730.38) v1@4725.51,2707.49 ; 4707.44,2698 cw(c4707.44,2672.44) v1@4725.51,2690.51 ; 4717.1,2698 ccw(c4717.1,2715.9) v1@4729.76,2703.24 ; v1@4734,2698 3860,2698 3837,2675 3837,2603 3811,2577 3758,2577 3730.83,2604.17 ; motor2.2@4987.56,1515.88 ccw(c4974.93,1528.51) 4992.79,1528.51 ; motor2.2@4992.79,1482 4992.79,1548.59 ; 4992.79,1533.34 ccw(c5017.47,1533.34) motor2.2@5000.02,1515.88 ; v1@4999.24,1566.06 cw(c4977.06,1564.32) 4992.79,1548.59 ; v1@5010.26,1555.04 ccw(c5008.52,1532.86) 4992.79,1548.59 ; v1(5011.2,1567) 4992.79,1548.59 ; 3649.47,2119.47 3649.47,1994.53 3724,1920 4242,1920
  Bottom Layer w6: MDE_STM32F407Z.66@3671.24,2182.9 ccw(c3625.96,2228.18) 3690,2228.18 ccw(c3754.04,2228.18) MDE_STM32F407Z.66@3708.76,2182.9 ; MDE_STM32F407Z.66@3675.48,2178.65 ccw(c3640.44,2213.7) 3690,2213.7 ccw(c3739.56,2213.7) MDE_STM32F407Z.66@3704.52,2178.65 ; MDE_STM32F407Z.66@3679.73,2174.41 ccw(c3654.93,2199.21) 3690,2199.21 ccw(c3725.07,2199.21) MDE_STM32F407Z.66@3700.27,2174.41 ; MDE_STM32F407Z.66@3690,2164.14 3690,2582.17 v1(3730.83,2623) ; v1@3718.83,2623 cw(c3689.86,2623) 3710.35,2602.51 cw(c3730.83,2582.03) v1@3730.83,2611 ; v1@4722,2699 4704,2699 4695,2690 4695,2297 4747,2245 4747,1919 4723,1895 4723,1830 4745,1808 4930,1808 4968,1770 4968,1610.2 v1(5011.2,1567) ; v1@4725.51,2690.51 ccw(c4705.03,2670.03) 4705.03,2699 ccw(c4705.03,2727.97) v1@4725.51,2707.49 ; v1@4999.2,1567 ccw(c4970.23,1567) 4990.71,1587.49 ccw(c5011.2,1607.97) v1@5011.2,1579
  other v1: 4734,2699
TIM1_PWMOUT4: MDE_STM32F407Z.67 motor2.3 SERVO2.10 | length 5346.7
  Top Layer w6: MDE_STM32F407Z.67@3763.47,2064.14 ccw(c3699.43,2064.14) 3744.71,2109.42 ccw(c3790,2154.71) MDE_STM32F407Z.67@3790,2090.67 ; MDE_STM32F407Z.67@3769.47,2064.14 ccw(c3719.91,2064.14) 3754.96,2099.18 ccw(c3790,2134.22) MDE_STM32F407Z.67@3790,2084.67 ; MDE_STM32F407Z.67@3775.47,2064.14 ccw(c3740.4,2064.14) 3765.2,2088.94 ccw(c3790,2113.74) MDE_STM32F407Z.67@3790,2078.67 ; v1@3777.93,2631.49 ccw(c3757.45,2651.97) 3786.42,2651.97 ccw(c3815.39,2651.97) v1@3794.9,2631.49 ; v1(3786.42,2623) 3786.42,2710.42 3836.33,2760.33 v1(4734,2760.33) ; MDE_STM32F407Z.67@3790,2064.14 3742,2112.14 3742,2197 3728,2211 3665,2211 3635.47,2181.47 3635.47,1984.53 3720,1900 4124,1900 SERVO2.10@4174,1850 ; SERVO2.10@4147.47,1850 ccw(c4083.43,1850) 4128.71,1895.29 ccw(c4174,1940.57) SERVO2.10@4174,1876.53 ; SERVO2.10@4153.47,1850 ccw(c4103.91,1850) 4138.96,1885.04 ccw(c4174,1920.09) SERVO2.10@4174,1870.53 ; SERVO2.10@4159.47,1850 ccw(c4124.4,1850) 4149.2,1874.8 ccw(c4174,1899.6) SERVO2.10@4174,1864.53 ; v1@4725.51,2751.85 ccw(c4705.03,2731.36) 4705.03,2760.33 ccw(c4705.03,2789.3) v1@4725.51,2768.82 ; v1@4936.11,1558.51 cw(c4915.63,1538.03) 4944.6,1538.03 cw(c4973.57,1538.03) v1@4953.09,1558.51 ; motor2.3@4938.34,1515.88 ccw(c4923.24,1530.99) 4944.6,1530.99 ; motor2.3@4943.57,1482 4944.6,1483.03 v1(4944.6,1567) ; 4944.6,1530.86 ccw(c4965.79,1530.86) motor2.3@4950.81,1515.88
  Bottom Layer w6: MDE_STM32F407Z.67@3763.47,2064.14 ccw(c3699.43,2064.14) 3744.71,2109.42 ccw(c3790,2154.71) MDE_STM32F407Z.67@3790,2090.67 ; MDE_STM32F407Z.67@3769.47,2064.14 ccw(c3719.91,2064.14) 3754.96,2099.18 ccw(c3790,2134.22) MDE_STM32F407Z.67@3790,2084.67 ; v1@3774.42,2623 cw(c3745.45,2623) 3765.93,2602.51 cw(c3786.42,2582.03) v1@3786.42,2611 ; MDE_STM32F407Z.67@3775.47,2064.14 ccw(c3740.4,2064.14) 3765.2,2088.94 ccw(c3790,2113.74) MDE_STM32F407Z.67@3790,2078.67 ; v1(3786.42,2623) 3711,2547.58 3711,2224 3739,2196 3739,2115.14 MDE_STM32F407Z.67@3790,2064.14 ; v1@4725.51,2751.85 ccw(c4705.03,2731.36) 4705.03,2760.33 ccw(c4705.03,2789.3) v1@4725.51,2768.82 ; v1(4734,2760.33) 4679.33,2760.33 4671,2752 4671,2289 4733,2227 4733,1936 4704,1907 4704,1822 4734,1792 4921,1792 4948,1765 v1@4948,1580 ; v1@4936.11,1575.49 ccw(c4907.42,1604.18) 4948,1604.18 ; v1@4940.36,1571.24 ccw(c4921.91,1589.69) 4948,1589.69 ; 4948,1587.76 ccw(c4965.36,1587.76) v1@4953.09,1575.49